# Altium PCB MediaLibra.PcbDoc
Units mm, origin at the board's own origin, x right, y up, seen from the top; angles counter-clockwise.
Board outline 115 x 25 mm, 2 copper layers (Top Layer, Bottom Layer); 19 components, 35 nets, 103 pads, 41 vias.
Unrouted connection lines stored in the file: 1.
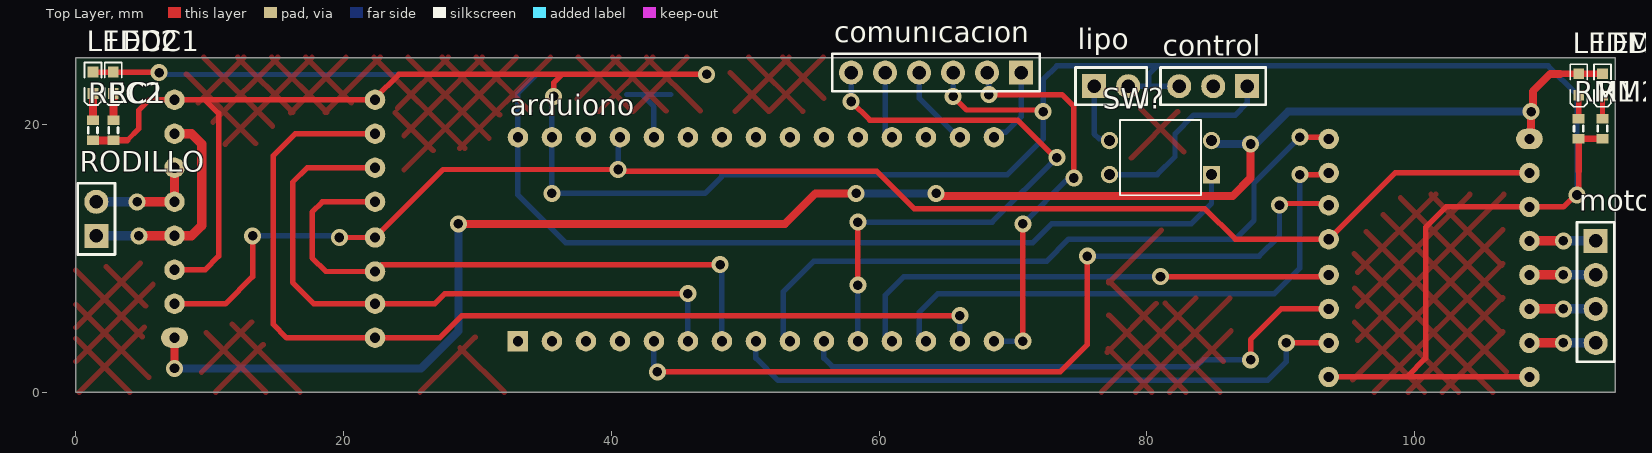
[diagram p0: Top Layer view]
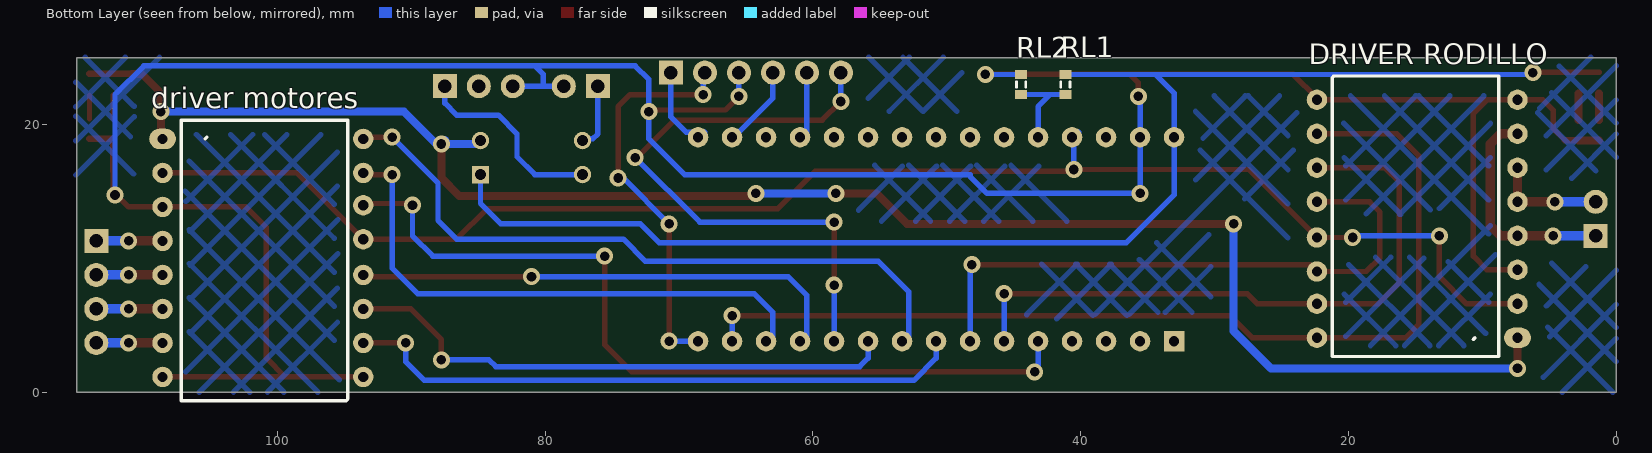
[diagram p1: Bottom Layer view, seen from below]
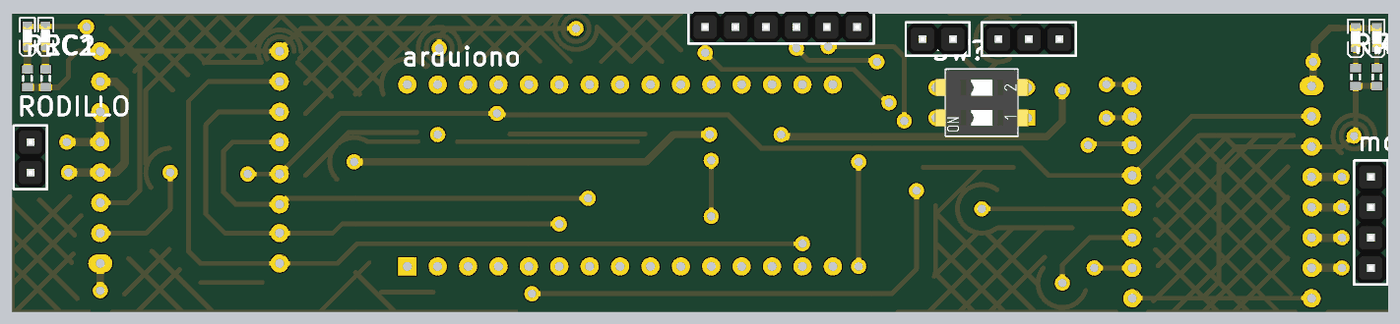
[diagram p2: 3D render of the assembled board from above, using the file's embedded part models]

## Layer stack, top to bottom
Top Solder: solder mask 0.0102, Solder Resist, Dk 3.5
Top Layer: signal copper 0.0356
Dielectric 1: dielectric 0.32, FR-4, Dk 4.8
Bottom Layer: signal copper 0.0356
Bottom Solder: solder mask 0.0102, Solder Resist, Dk 3.5

## Board outline
0,0 115,0 115,25 0,25

## Design rules (kind name [scope] priority, off if disabled: settings)
Clearance MallaC [InPolygon] p1: gap=1.2 ignorepadtopadclearanceinfootprint=FALSE
Clearance [All] p2: gap=0.254 ignorepadtopadclearanceinfootprint=FALSE except(0: Arc-Hole Track-Hole SMDPad-Hole THPad-Hole Via-Hole Fill-Hole Poly-Hole Region-Hole Text-Hole)
PolygonConnect [All] p1: connectstyle=Relief reliefconductorwidth=0.254 reliefentries=4 polygonreliefangle="90 Angle" airgapwidth=0.254
RoutingVias [All] p1: holewidth=0.711 width=1.27 viastyle="Through Hole" minholewidth=0.711 minwidth=1.27 maxholewidth=0.711 maxwidth=1.27
SolderMaskExpansion [All] p1: expansion=0.102
Width MallaW [InPolygon] p1: maxlimit=0.5 minlimit=0.3 preferedwidth=0.4
Width [All] p2: maxlimit=0.7 minlimit=0.3 preferedwidth=0.4
30 further rules are at their usual default settings.

## Classes and differential pairs
component class MediaLibra: comunicacion control "driver motores" "DRIVER RODILLO" LEDC1 LEDC2 LEDM1 LEDM2 lipo motor RC1 REC2 RL1 RL2 RM1 RM2 RODILLO SW?

## Components (designator, comment, footprint, x,y, rotation, side; value= is the part's Value field where it differs from the comment)
arduiono "arduinoNano" "Arduino nano" 28.956,2.286 r0 top
comunicacion "Connector" "1x6x2.54 Pin Header TH V" 64.262,23.876 r180 top
control "Connector" "1x3x2.54 Pin Header TH V" 84.963,22.86 r180 top
"driver motores" "TB66" PCBComponent_1 108.458,18.415 r270 bottom
"DRIVER RODILLO" "TB66" PCBComponent_1 7.493,4.572 r90 bottom
LEDC1 "150060YS75000" LED_0603_Yellow 2.794,23.114 r270 top
LEDC2 "150060YS75000" LED_0603_Yellow 1.27,23.114 r270 top
LEDM1 "150060YS75000" LED_0603_Yellow 112.268,22.987 r270 top
LEDM2 "150060YS75000" LED_0603_Yellow 114.046,22.987 r270 top
lipo "Connector" "1x2x2.54 Pin Header TH V" 77.343,22.86 r0 top
motor "Connector" "1x4x2.54 Pin Header TH V" 113.538,7.493 r270 top
RC1 "Res3" J1-0603 2.794,19.57 r90 top value=1K
REC2 "Res3" J1-0603 1.27,19.57 r90 top value=1K
RL1 "Res3" J1-0603 41.148,22.987 r90 bottom value=1K
RL2 "Res3" J1-0603 44.45,22.987 r270 bottom value=1K
RM1 "Res3" J1-0603 112.268,19.685 r90 top value=1K
RM2 "Res3" J1-0603 114.046,19.685 r90 top value=1K
RODILLO "Connector" "1x2x2.54 Pin Header TH V" 1.524,12.954 r90 top
SW? "WE-Dip Switches WS-DITV 418127160902" 418127160902 81.026,17.526 r90 top

## Footprints (in the part's own frame and the unit in brackets; to place one, negate y for a bottom-side part, rotate by r counter-clockwise, add the part's x,y. Pads: shape width x height; smd on the part's side, far side on the other; paste and mask are expansions set on the pad)
"1x2x2.54 Pin Header TH V" [mm] "1x2x2.54 Pin Header TH V"
  rect 1.8x1.8 hole 1: 1(-1.27,0)
  round 1.8 hole 1: 2(1.27,0)
  silkscreen extent -2.67,-1.4 2.67,1.4, body extent -2.54,-1.27 2.54,1.27, height 8.55
"1x3x2.54 Pin Header TH V" [mm] "1x3x2.54 Pin Header TH V"
  rect 1.8x1.8 hole 1: 1(-2.54,0)
  round 1.8 hole 1: 2(0,0) 3(2.54,0)
  silkscreen extent -3.94,-1.4 3.94,1.4, body extent -3.81,-1.27 3.81,1.27, height 8.55
"1x4x2.54 Pin Header TH V" [mm] "1x4x2.54 Pin Header TH V"
  rect 1.8x1.8 hole 1: 1(-3.81,0)
  round 1.8 hole 1: 2(-1.27,0) 3(1.27,0) 4(3.81,0)
  silkscreen extent -5.21,-1.4 5.21,1.4, body extent -5.08,-1.27 5.08,1.27, height 8.55
"1x6x2.54 Pin Header TH V" [mm] "1x6x2.54 Pin Header TH V"
  rect 1.8x1.8 hole 1: 1(-6.35,0)
  round 1.8 hole 1: 2(-3.81,0) 3(-1.27,0) 4(1.27,0) 5(3.81,0) 6(6.35,0)
  silkscreen extent -7.75,-1.4 7.75,1.4, body extent -7.62,-1.27 7.62,1.27, height 8.55
418127160902 [mm] "02p, 2.54mm Pitch, Horizontal, IC Type, THT, flat Actuator, black, with Tape, Tube"
  rect 1.3x1.3 hole 0.8: 1(-1.27,-3.81)
  round 1.3 hole 0.8: 2(1.27,-3.81) 3(1.27,3.81) 4(-1.27,3.81)
  silkscreen extent -2.81,-3.02 2.81,3.02, body extent -2.76,-3.93 2.76,3.94, height 3.65
"Arduino nano" [mil] "arduino nano"
  rect 60x60 hole 30: 0(160,60)
  round 60 hole 30: 1(260,60) 2(360,60) 3(460,60) 4(560,60) 5(660,60) 6(760,60) 7(860,60) 8(960,60) 9(1060,60) 10(1160,60) 11(1260,60) 12(1360,60) 13(1460,60) 14(1560,60) 15(1560,660) 16(1460,660) 17(1360,660) 18(1260,660) 19(1160,660) 20(1060,660) 21(960,660) 22(860,660) 23(760,660) 24(660,660) 25(560,660) 26(460,660) 27(360,660) 28(260,660) 29(160,660)
J1-0603 [mm] "Chip Resistor, Body 1.6x0.8mm, IPC High Density"
  rect 0.7x0.9 smd: 1(-0.75,0) 2(0.75,0)
  silkscreen extent -0.2,-0.35 0.2,0.35, body extent -0.85,-0.48 0.85,0.48, height 0.9
LED_0603_Yellow [mm] "Chip LED, 2-Leads, Body 1.6x0.8mm, IPC Medium Density"
  rect 0.8x0.8 smd: 1(-0.8,0) 2(0.8,0)
  silkscreen extent -1.52,-0.64 1.65,0.64, body extent -0.8,-0.4 0.8,0.4, height 0.7
PCBComponent_1 [mil]
  oval 60x78.74 hole 30: 1(-20,-5)
  round 60 hole 30: 2(80,-5) 3(180,-5) 4(280,-5) 5(380,-5) 6(480,-5) 7(580,-5) 8(680,-5) 9(680,585) 10(580,585) 11(480,585) 12(380,585) 13(275,585) 14(175,585) 15(80,585) 16(-20,585)
  silkscreen extent -75,50 750,540

## Part data
comunicacion: library part "Header 1x6"
control: library part "Header 1x3"
LEDC1 LEDC2 LEDM1 LEDM2: library part "WL-SMCW 0603  150060YS75000", "SMD mono-color Chip LED, WL-SMCW, Yellow", Color=Yellow, Manufacturer="W?th Elektronik eiSos GmbH", ComponentLink1Description=Manufacturer, ComponentLink1URL=http://www.we-online.de, ComponentLink2Description=Datasheet, ComponentLink2URL=http://katalog.we-online.com/led/datasheet/150060YS75000.pdf, Created by="Christin Otto", Created Date="June 2013", PartNo=150060YS75000
lipo RODILLO: library part "Header 1x2"
motor: library part "Header 1x4"
RC1 REC2 RL1 RL2 RM1 RM2: "Resistor", LatestRevisionDate=29-May-2009, LatestRevisionNote="IPC-7351 Footprint Added.", PackageDescription="Chip Resistor", PackageReference=J1-0603, Published=8-Jun-2000, Publisher="Altium Limited"
SW?: "WS-DITV 2.54 mm small compact THT Dip Switch with top tape", Manufacturer="Würth Elektronik eiSos GmbH & Co.KG", PartNo=418127160902, ComponentLink1 Description=Manufacturer, ComponentLink1URL=http://www.we-online.com, ComponentLink2 Description=Datasheet, ComponentLink2URL=http://katalog.we-online.de/em/datasheet/4181271609xx.pdf, Creat by="Karrer Zheng", Creat Date="20 February 2014", NoPins=4

## Via types
v1: diameter 1.27, hole 0.711, Top Layer to Bottom Layer, 41 vias

## Nets (pads, with @x,y where several pads share a name; then routed paths per layer and width w, separated by ;. In a path a pad name is that pad's centre, name@x,y a point inside that pad or via, vN(x,y) a via of type N, cw(c..) or ccw(c..) an arc to the next point about the centre after c; other vN are vias at no path point)
3.3V: arduiono.16 comunicacion.4 | length 5.8
  Bottom Layer w0.4: comunicacion.4@62.992,24.13 comunicacion.4 62.992,21.971 arduiono.16@65.532,19.431
ADC: arduiono.25 RL1.1 RL2.2 | length 6.9
  Bottom Layer w0.4: RL1.1 42.291,22.237 ; arduiono.25 43.18,21.348 42.291,22.237 ; RL2.2 42.291,22.237
AIN1: "driver motores.14" arduiono.4 | length 63.6
  Top Layer w0.4: v1(43.434,1.524) 73.533,1.524 75.565,3.556 v1(75.565,10.16) ; v1(89.916,13.97) 89.789,13.97 89.662,14.097 93.218,14.097 93.472,13.843 93.599,13.97
  Bottom Layer w0.4: arduiono.4 43.18,1.778 v1(43.434,1.524) ; v1(75.565,10.16) 88.392,10.16 89.916,11.684 v1(89.916,13.97)
AIN2: "driver motores.15" arduiono.12 | length 40.8
  Top Layer w0.4: v1(91.44,16.256) 93.472,16.256 93.599,16.383
  Bottom Layer w0.4: arduiono.12@62.992,4.191 62.992,5.969 64.389,7.366 89.535,7.366 91.44,9.271 v1(91.44,16.256)
AINR1: "DRIVER RODILLO.12" "DRIVER RODILLO.14" arduiono.6 | length 45.3
  Top Layer w0.4: 22.352,14.224 18.415,14.224 17.653,13.462 17.653,10.033 18.669,9.017 22.352,9.017 22.86,9.525 v1(48.133,9.525)
  Bottom Layer w0.4: v1(48.133,9.525) 48.26,9.398 arduiono.6
AINR2: "DRIVER RODILLO.11" "DRIVER RODILLO.15" arduiono.5 | length 49.2
  Top Layer w0.4: 22.352,16.764 17.272,16.764 16.192,15.684 16.192,8.191 17.78,6.604 22.352,6.604 26.797,6.604 27.559,7.366 v1(45.72,7.366)
  Bottom Layer w0.4: arduiono.5 v1(45.72,7.366) ; v1(45.72,7.366) 45.72,7.747 45.974,7.493 45.847,7.366 v1(45.72,7.366)
AO1: "driver motores.4" motor.1 | length 5
  Top Layer w0.7: 108.585,11.303 v1(111.125,11.303)
  Bottom Layer w0.7: v1(111.125,11.303) motor.1
AO2: "driver motores.5" motor.2 | length 5
  Top Layer w0.7: 108.585,8.763 v1(111.125,8.763)
  Bottom Layer w0.7: v1(111.125,8.763) motor.2
ARO1: "DRIVER RODILLO.4" "DRIVER RODILLO.7" RODILLO.1 | length 16.6
  Top Layer w0.7: v1(4.699,11.684) 7.366,11.684 8.636,11.684 9.398,12.446 9.398,18.542 8.636,19.304 7.366,19.304
  Bottom Layer w0.7: RODILLO.1 v1(4.699,11.684)
ARO2: "DRIVER RODILLO.5" "DRIVER RODILLO.6" RODILLO.2 | length 8.4
  Top Layer w0.7: v1(4.572,14.224) 7.366,14.224 7.366,16.764
  Bottom Layer w0.7: RODILLO.2 v1(4.572,14.224)
ATTENTION: arduiono.18 comunicacion.5 | length 4.7
  Bottom Layer w0.4: arduiono.18@60.452,19.431 comunicacion.5 comunicacion.5@60.452,24.13
BIN1: "driver motores.12" arduiono.11 | length 36.8
  Top Layer w0.4: v1(81.026,8.636) 93.472,8.636 93.599,8.763
  Bottom Layer w0.4: arduiono.11@60.452,4.191 60.452,7.239 61.849,8.636 v1(81.026,8.636)
BIN2: "driver motores.11" arduiono.9 | length 41.9
  Top Layer w0.4: v1(87.757,2.413) 87.757,3.937 90.043,6.223 93.599,6.223
  Bottom Layer w0.4: arduiono.9 55.88,2.54 56.515,1.905 83.693,1.905 84.201,2.413 v1(87.757,2.413)
BO1: "driver motores.7" motor.4 | length 5
  Top Layer w0.7: 108.585,3.683 v1(111.125,3.683)
  Bottom Layer w0.7: v1(111.125,3.683) motor.4
BO2: "driver motores.6" motor.3 | length 5
  Top Layer w0.7: 108.585,6.223 v1(111.125,6.223)
  Bottom Layer w0.7: v1(111.125,6.223) motor.3
CLOCK: arduiono.10 comunicacion.6 | length 44.5
  Top Layer w0.4: v1(57.912,21.717) 59.309,20.32 70.358,20.32 73.152,17.526 v1(73.279,17.526) ; v1(58.42,8.001) v1(58.42,12.7)
  Bottom Layer w0.4: v1@57.912,22.225 comunicacion.6 ; arduiono.10 v1(58.42,8.001) ; v1(58.42,12.7) 68.453,12.7 v1(73.279,17.526)
COMMAND: arduiono.14 comunicacion.2 | length 30.4
  Top Layer w0.4: v1(68.199,22.225) 73.66,22.225 74.549,21.336 v1(74.549,16.002) ; v1(70.739,3.81) v1(70.739,12.573)
  Bottom Layer w0.4: comunicacion.2@68.072,24.13 68.199,24.003 v1(68.199,22.225) v1@68.199,21.971 ; arduiono.14 v1(70.739,3.81) ; v1(70.739,12.573) 74.168,16.002 v1(74.549,16.002)
DATA: arduiono.15 comunicacion.1 | length 6.6
  Bottom Layer w0.4: arduiono.15@68.072,19.431 69.469,19.431 70.612,20.574 comunicacion.1 comunicacion.1@70.612,24.13
GND: "driver motores.3" "driver motores.8" "driver motores.9" "DRIVER RODILLO.3" "DRIVER RODILLO.8" "DRIVER RODILLO.9" arduiono.3 arduiono.28 comunicacion.3 control.3 lipo.2 RC1.1 REC2.1 RL2.1 RM1.1 RM2.1 | length 228.9
  Top Layer w0.4: 3.834,18.82 4.699,19.685 4.699,21.082 5.461,21.844 7.366,21.844 9.652,21.844 ; 7.366,9.144 9.652,9.144 10.668,10.16 10.668,20.828 9.652,21.844 ; v1(35.56,14.859) 35.941,14.859 v1@35.814,14.732 ; v1(35.687,22.098) 35.687,23.114 36.322,23.749 ; v1(47.117,23.749) 36.322,23.749 ; v1(65.532,22.098) 66.548,21.082 v1@72.136,21.082 ; 93.599,1.143 99.441,1.143 ; 108.585,1.143 99.441,1.143 ; 112.268,16.51 112.268,14.986 111.125,13.843 108.585,13.843 102.362,13.843 100.838,12.319 100.838,2.54 99.441,1.143 ; 9.652,21.844 22.352,21.844 22.352,21.971 24.13,23.749 36.322,23.749
  Top Layer w0.5: RC1.1 3.834,18.82 ; 112.268,16.51 RM1.1 RM2.1
  Top Layer w0.6: REC2.1 RC1.1
  Bottom Layer w0.4: v1(35.687,22.098) 35.56,21.971 arduiono.28 v1(35.56,14.859) 46.99,14.859 48.26,16.129 48.26,16.256 69.596,16.256 72.263,18.923 v1(72.263,20.955) 72.263,23.368 73.279,24.384 80.772,24.384 ; arduiono.3 arduiono.3@40.64,4.318 ; RL2.1 47.105,23.737 v1(47.117,23.749) ; v1(65.532,22.098) comunicacion.3 ; lipo.2@78.613,23.241 78.994,22.86 80.137,22.86 ; control.3@82.423,23.368 81.915,22.86 80.137,22.86 ; v1(112.141,14.732) 112.141,22.225 109.982,24.384 80.772,24.384 ; 80.137,22.86 80.137,23.749 80.772,24.384
LIPOC: control.1 SW?.4 | length 14.8
  Bottom Layer w0.4: SW?.4 80.772,16.256 82.105,17.59 82.105,19.304 83.502,20.701 86.614,20.701 87.503,21.59 control.1
LIPOM: lipo.1 SW?.3 | length 5.2
  Bottom Layer w0.4: lipo.1@76.073,23.241 lipo.1 76.073,19.304 76.454,18.923 SW?.3@77.216,18.923
NetLEDC1_2: LEDC1.2 RC1.2 | length 2
  Top Layer w0.6: RC1.2 LEDC1.2
NetLEDC2_2: LEDC2.2 REC2.2 | length 2
  Top Layer w0.6: REC2.2 LEDC2.2
NetLEDM1_2: LEDM1.2 RM1.2 | length 1.8
  Top Layer w0.4: RM1.2 LEDM1.2
NetLEDM2_2: LEDM2.2 RM2.2 | length 1.8
  Top Layer w0.4: RM2.2 LEDM2.2
PWMA: "driver motores.16" arduiono.8 | length 50.5
  Top Layer w0.4: v1(91.44,19.05) 93.472,19.05 93.599,18.923
  Bottom Layer w0.4: arduiono.8@52.832,4.191 52.832,7.493 55.118,9.779 72.517,9.779 74.168,11.43 86.614,11.43 88.011,12.827 88.011,15.621 v1(91.44,19.05)
PWMB: "driver motores.10" arduiono.7 | length 46.7
  Top Layer w0.4: v1(90.424,3.683) 93.599,3.683
  Bottom Layer w0.4: arduiono.7 50.8,2.54 52.451,0.889 89.027,0.889 90.424,2.286 v1(90.424,3.683)
PWMR: "DRIVER RODILLO.10" "DRIVER RODILLO.16" arduiono.13 | length 75.2
  Top Layer w0.4: 22.352,19.304 16.383,19.304 14.732,17.653 14.732,5.08 15.748,4.064 22.352,4.064 27.178,4.064 28.829,5.715 v1(66.04,5.715)
  Bottom Layer w0.4: arduiono.13 v1(66.04,5.715)
RX: arduiono.1
SDA: arduiono.22
SDL: arduiono.23
TX: arduiono.0
VCC: "driver motores.2" "driver motores.13" "DRIVER RODILLO.2" "DRIVER RODILLO.13" arduiono.26 | length 114.5
  Top Layer w0.4: 7.366,6.604 11.176,6.604 13.208,8.636 v1(13.208,11.684) ; v1(19.685,11.557) 22.352,11.557 27.432,16.637 v1(40.513,16.637) 40.64,16.51 59.817,16.51 62.611,13.716 84.328,13.716 86.614,11.43 93.599,11.43 98.552,16.383 108.585,16.383
  Bottom Layer w0.4: v1(13.208,11.684) 19.558,11.684 v1(19.685,11.557) ; arduiono.26@40.132,19.431 40.64,18.923 40.513,18.796 v1(40.513,16.637)
VCONTROL: arduiono.29 LEDC1.1 LEDC2.1 RL1.2 SW?.1 | length 106.2
  Top Layer w0.4: LEDC2.1 LEDC1.1 6.185,23.914 v1(6.223,23.876)
  Bottom Layer w0.4: v1(6.223,23.876) 6.362,23.737 34.417,23.737 ; RL1.2 34.417,23.737 ; SW?.1 84.836,14.097 83.312,12.573 72.898,12.573 71.501,11.176 36.576,11.176 33.02,14.732 arduiono.29 33.02,22.34 34.417,23.737
VMOTOR: "driver motores.1" "DRIVER RODILLO.1" LEDM1.1 LEDM2.1 SW?.2 | length 130.7
  Top Layer w0.5: 108.585,18.923 108.712,19.05 ; 110.871,23.787 LEDM1.1 LEDM2.1
  Top Layer w0.6: v1(7.366,1.778) 7.366,4.064 ; v1(28.575,12.573) 52.959,12.573 55.245,14.859 v1(58.293,14.859) ; v1(64.262,14.859) 64.453,14.668 86.423,14.668 87.757,16.002 v1(87.757,18.542) ; 108.712,19.05 v1(108.712,20.955) 108.839,21.082 108.839,22.479 110.147,23.787 110.871,23.787
  Bottom Layer w0.6: v1(7.366,1.778) 25.781,1.778 28.575,4.572 v1(28.575,12.573) ; v1(58.293,14.859) v1(64.262,14.859) ; SW?.2 85.09,18.542 v1(87.757,18.542) 88.138,18.542 90.551,20.955 v1(108.712,20.955)
  Bottom Layer w0.7: v1@87.503,18.796 v1(87.757,18.542)
pads on no net: arduiono.2 arduiono.17 arduiono.19 arduiono.20 arduiono.21 arduiono.24 arduiono.27 control.2

## Polygon pours and split planes (outlines as drawn)
GND on Top Layer "Bottom Layer-No Net" (hatched 45Degree grid 1.8 track 0.4, remove dead copper, pour order 2): 0,25.019 114.935,25.019 115.062,24.892 115.062,0 0,0
GND on Bottom Layer "Bottom Layer-No Net" (hatched 45Degree grid 1.8 track 0.4, remove dead copper, pour order 4): 0,25.019 115.062,25.019 115.062,0 0,0

## Silkscreen, mask and mechanical layers (free items; w line width, h text height)
Mechanical 1:
  the board outline again, w0.254